# EAGLE board Ruelta2denuevo (EAGLE 7.7.0)
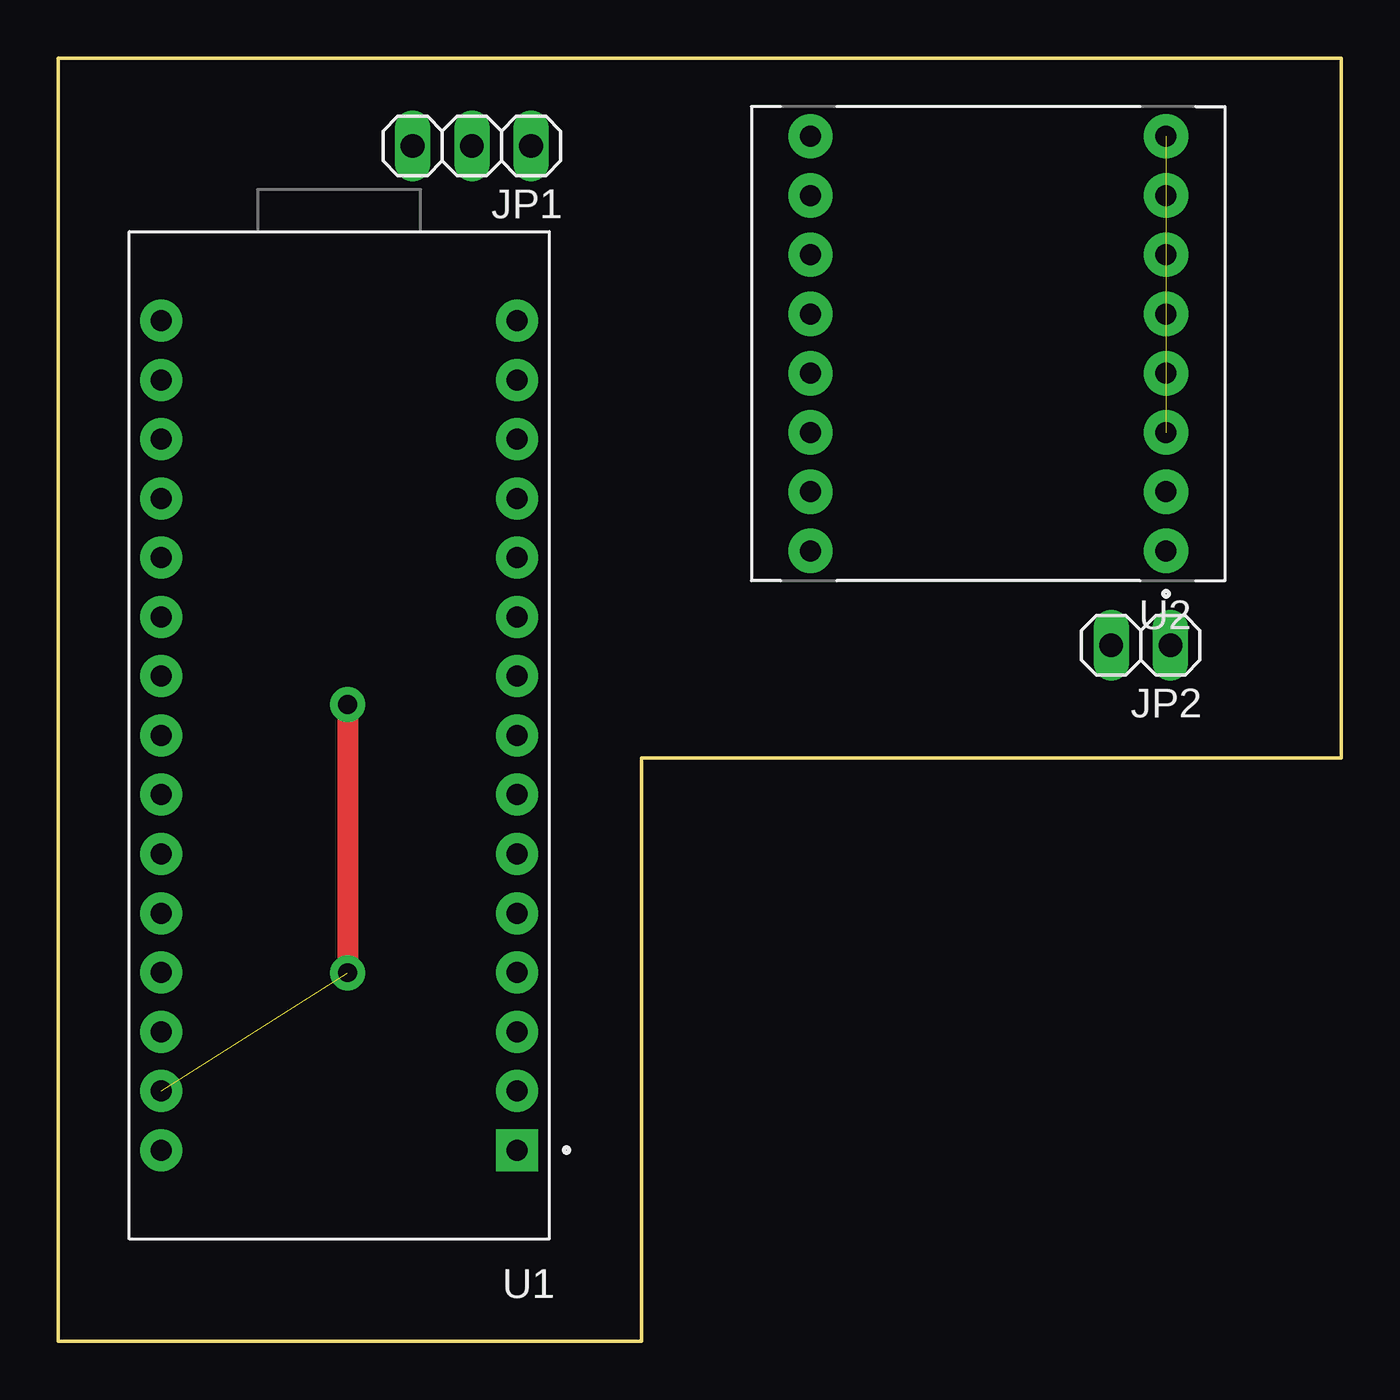
[diagram p0: board, top side]
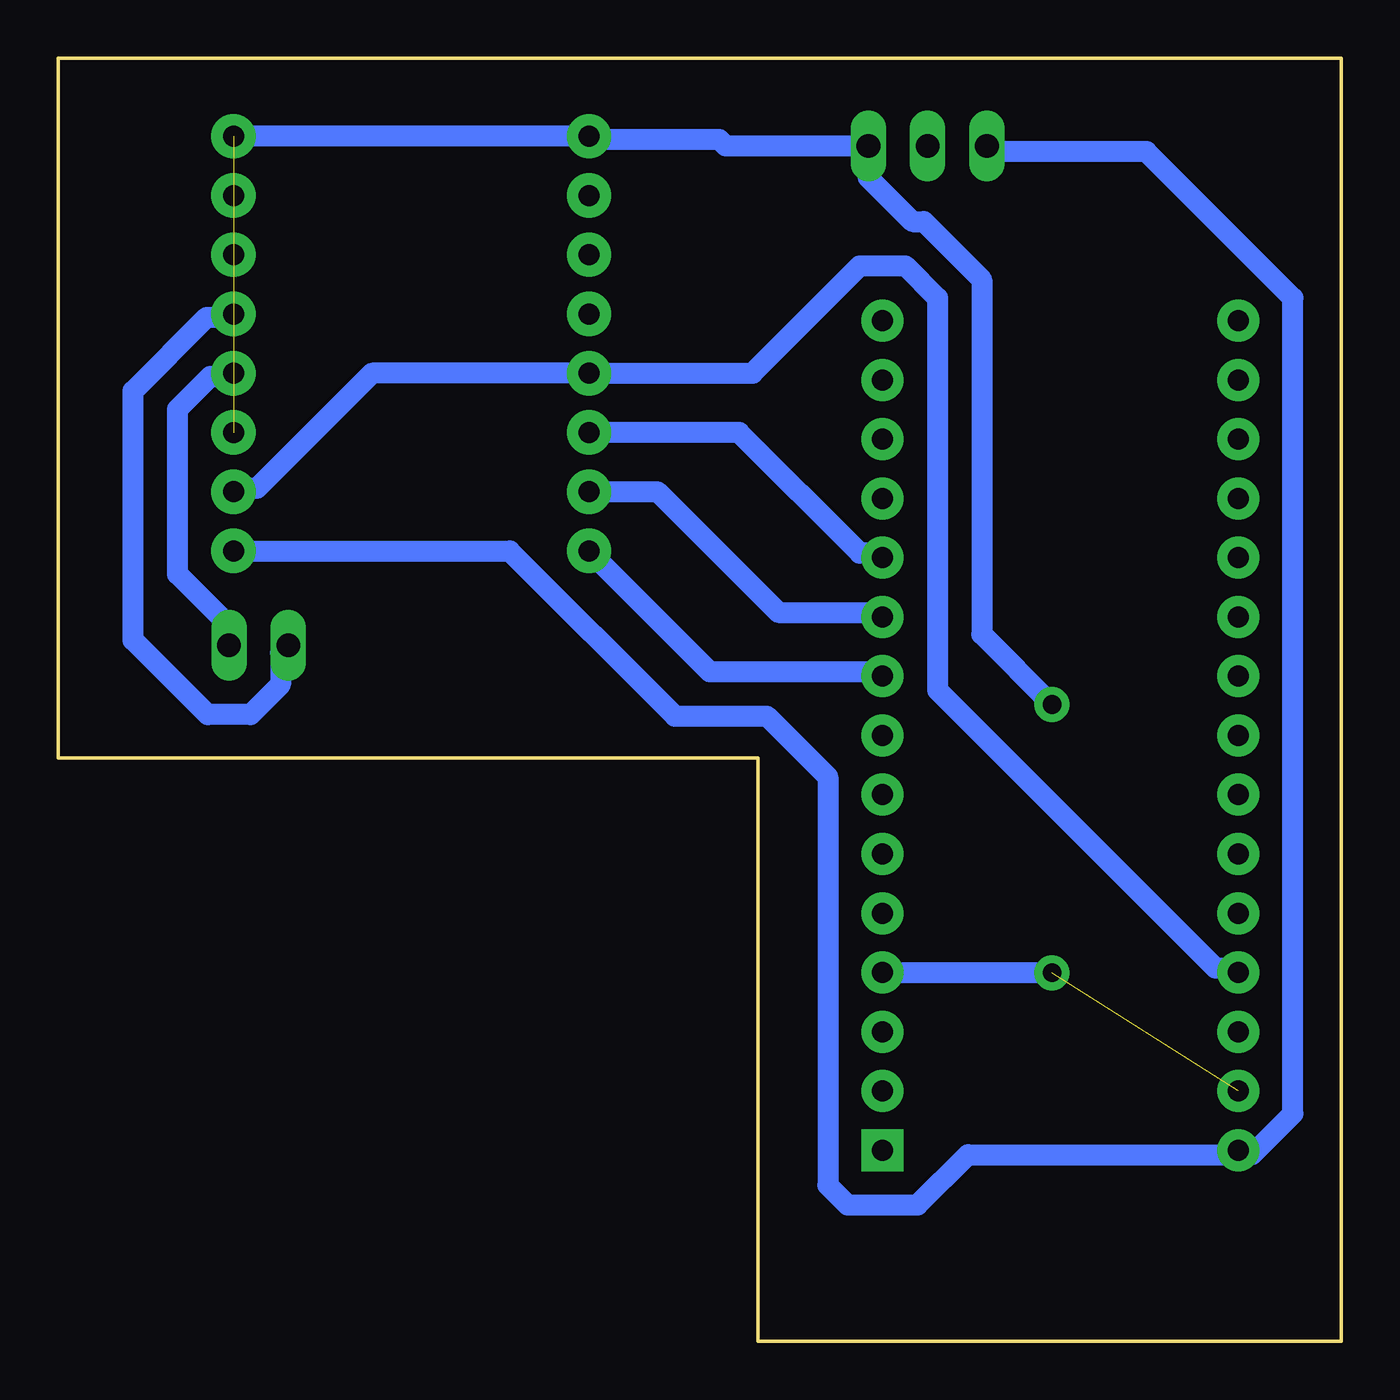
[diagram p1: board, bottom side, seen from below]

Size 55 x 55 mm. Coordinates in mm from the lower left corner, seen from the top.
Outline: 0,0 0,55 55,55 55,25 25,25 25,0 0,0
Copper layers (1*16): Top 0.035mm / dielectric 1.5mm / Bottom 0.035mm
Design rules "config bien": minimum track width 0.9mm, minimum drill 0.35mm, track to track 1mm, track to pad 1mm, pad to pad 1mm, via to via 1mm, smd to smd 1mm, copper to edge 40mil, drill to drill 6mil, minimum pad ring 10mil, minimum via ring 8mil, stop-mask expansion 4mil, vias tented up to drill 0mil, thermal gap 10mil

## Footprints (pad centres in the part's own frame; a part is rotated, then mirrored left to right if it is on the bottom)
1X03 = drill 1.016 long: 1 -2.54,0; 2 0,0; 3 2.54,0
1X02 = drill 1.016 long: 1 -1.27,0; 2 1.27,0
MODULE_ARDUINO_NANO = drill 0.9 pad 1.8 square: 1 -7.62,17.78 | drill 0.9 pad 1.8: 2 -7.62,15.24; 3 -7.62,12.7; 4 -7.62,10.16; 5 -7.62,7.62; 6 -7.62,5.08; 7 -7.62,2.54; 8 -7.62,0; 9 -7.62,-2.54; 10 -7.62,-5.08; 11 -7.62,-7.62; 12 -7.62,-10.16; 13 -7.62,-12.7; 14 -7.62,-15.24; 15 -7.62,-17.78; 16 7.62,-17.78; 17 7.62,-15.24; 18 7.62,-12.7; 19 7.62,-10.16; 20 7.62,-7.62; 21 7.62,-5.08; 22 7.62,-2.54; 23 7.62,0; 24 7.62,2.54; 25 7.62,5.08; 26 7.62,7.62; 27 7.62,10.16; 28 7.62,12.7; 29 7.62,15.24; 30 7.62,17.78
MODULE_ROB-14450 = drill 0.9 pad 1.9: 1 -7.62,8.89; 2 -7.62,6.35; 3 -7.62,3.81; 4 -7.62,1.27; 5 -7.62,-1.27; 6 -7.62,-3.81; 7 -7.62,-6.35; 8 -7.62,-8.89; 9 7.62,-8.89; 10 7.62,-6.35; 11 7.62,-3.81; 12 7.62,-1.27; 13 7.62,1.27; 14 7.62,3.81; 15 7.62,6.35; 16 7.62,8.89

## Placement (x,y rotation side)
JP1  [1X03]  17.73,51.24 180 top
JP2  [1X02]  46.41,29.84 180 top
U1  ARDUINO_NANO  [MODULE_ARDUINO_NANO]  12.04,25.97 180 top
U2  ROB-14450  [MODULE_ROB-14450]  39.87,42.77 180 top

## Library data of the parts
JP1 JP2 = pinhead
U1 = ARDUINO_NANO; AVAILABILITY: Not in stock; CHECK_PRICES: https://www.snapeda.com/parts/Arduino%20Nano/Arduino/view-part/?ref=eda; DESCRIPTION: Small, complete, and breadboard-friendly board based on the ATmega328 (Arduino Nano 3.x); MF: Arduino; MP: Arduino Nano; PACKAGE: Non-Standard Arduino; PRICE: None; SNAPEDA_LINK: https://www.snapeda.com/parts/Arduino%20Nano/Arduino/view-part/?ref=snap
U2 = ROB-14450; AVAILABILITY: In Stock; CHECK_PRICES: https://www.snapeda.com/parts/ROB-14450/SparkFun/view-part/?ref=eda; DESCRIPTION: TB6612FNG - Motor Controller/Driver Power Management Evaluation Board; MF: SparkFun Electronics; MP: ROB-14450; PACKAGE: None; PRICE: None; SNAPEDA_LINK: https://www.snapeda.com/parts/ROB-14450/SparkFun/view-part/?ref=snap

## Nets
3V3: U1.17
5V: U1.27 U2.2 U2.13
AREF: U1.18
D6: U1.9 U2.16
D7: U1.10 U2.15
D8: U1.11 U2.14
D9: U1.12
GND: JP1.1 U1.4 U1.29 U2.3 U2.8 U2.9
M1: JP2.1 U2.4
M2: JP2.2 U2.5
PWMB: U2.10
VIN: JP1.3 U1.30 U2.1

## Tracks (layer width: path | path; a pad name or v marks a point on that pad's centre or on a via)
5V
  Bottom 0.9: U1.27 4.61,16 5.39,16 17.31,27.92 17.31,44.72 18.69,46.1 20.63,46.1 25.23,41.5 U2.13 41.56,41.5 46.5,36.56 47.35,36.56 U2.2
D6
  Bottom 0.9: U1.9 19.85,28.7 27.07,28.7 U2.16
D7
  Bottom 0.9: U1.10 19.85,31.24 24.13,31.24 29.31,36.42 U2.15
D8
  Bottom 0.9: U1.11 19.85,33.78 20.63,33.78 25.81,38.96 U2.14
GND  (via drill 0.8 pad 1.5)  (2 unrouted)
  Top 0.9: v12.4,27.3 v12.4,15.8
  Bottom 0.9: U2.8 U2.9 32.11,51.52 26.66,51.52 26.38,51.24 JP1.1 20.27,49.89 18.38,48 17.9,48 15.41,45.51 15.41,30.31 v12.4,27.3 | v12.4,15.8 U1.4
M1
  Bottom 0.9: U2.4 47.63,41.36 48.48,41.36 49.89,39.95 49.89,32.89 47.68,30.68 JP2.1
M2
  Bottom 0.9: JP2.2 45.47,29.51 45.47,28.16 46.76,26.87 48.6,26.87 51.79,30.06 51.79,40.74 48.63,43.9 47.63,43.9 U2.5
VIN
  Bottom 0.9: 4.25,8 U1.30 | U2.1 35.64,33.88 28.56,26.8 24.62,26.8 22.01,24.19 22.01,6.69 21.16,5.84 18.16,5.84 16,8 4.25,8 | JP1.3 14.95,51 8.35,51 2.07,44.72 2.07,9.76 3.83,8 4.25,8